# EAGLE board RADiuS-S (EAGLE 6.2)
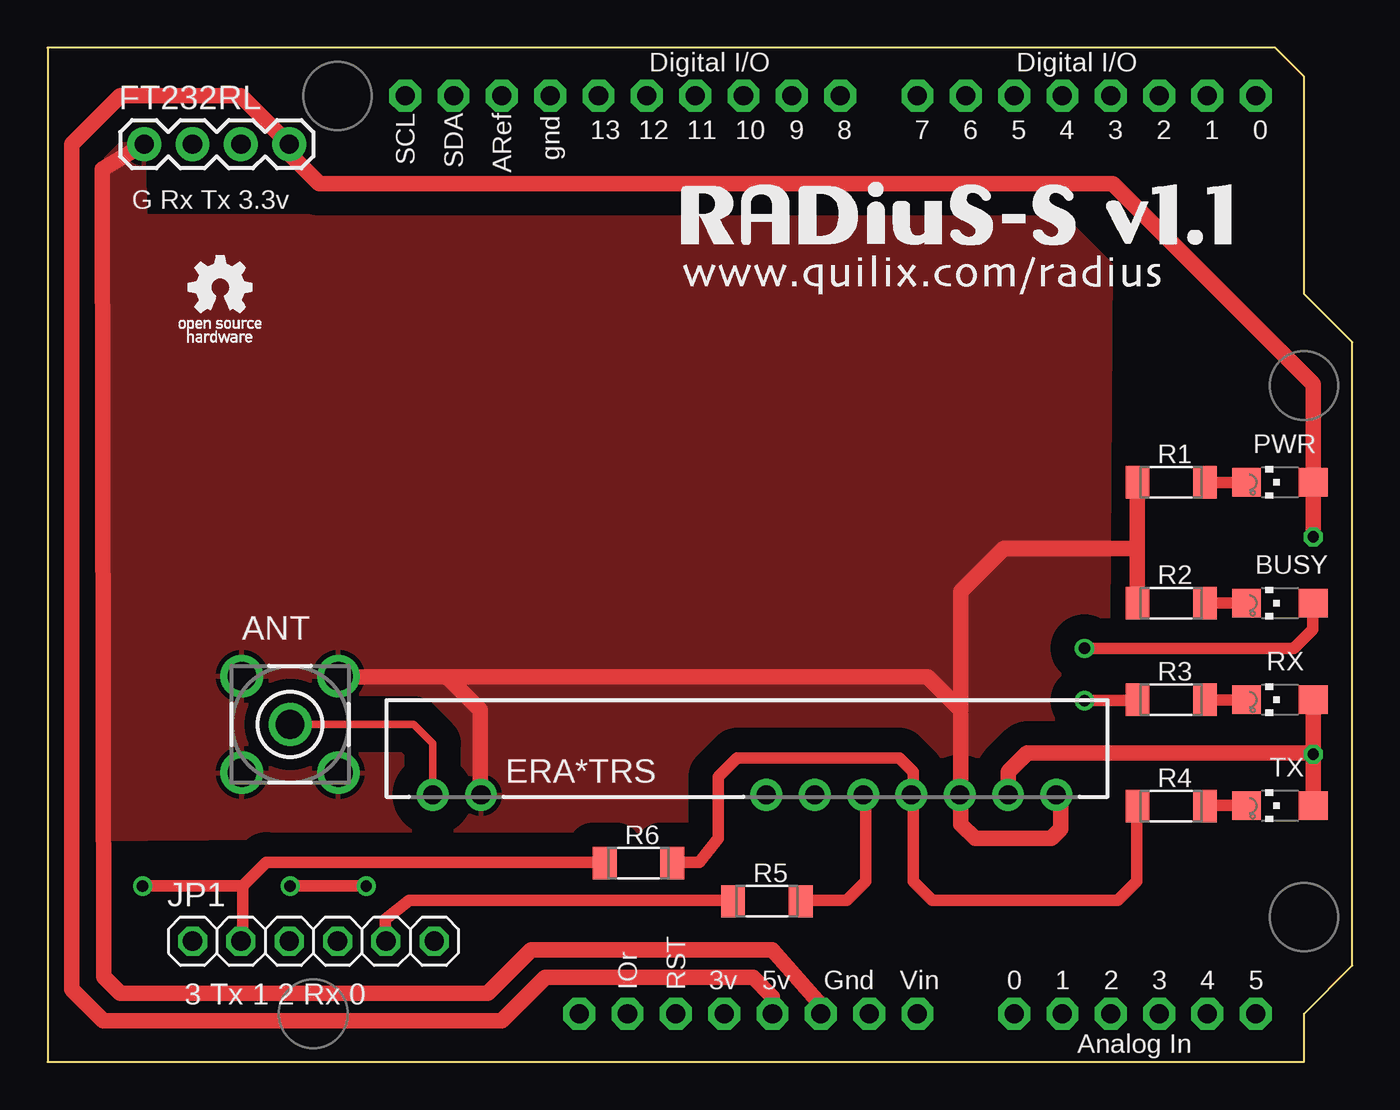
[diagram p0: board, top side]
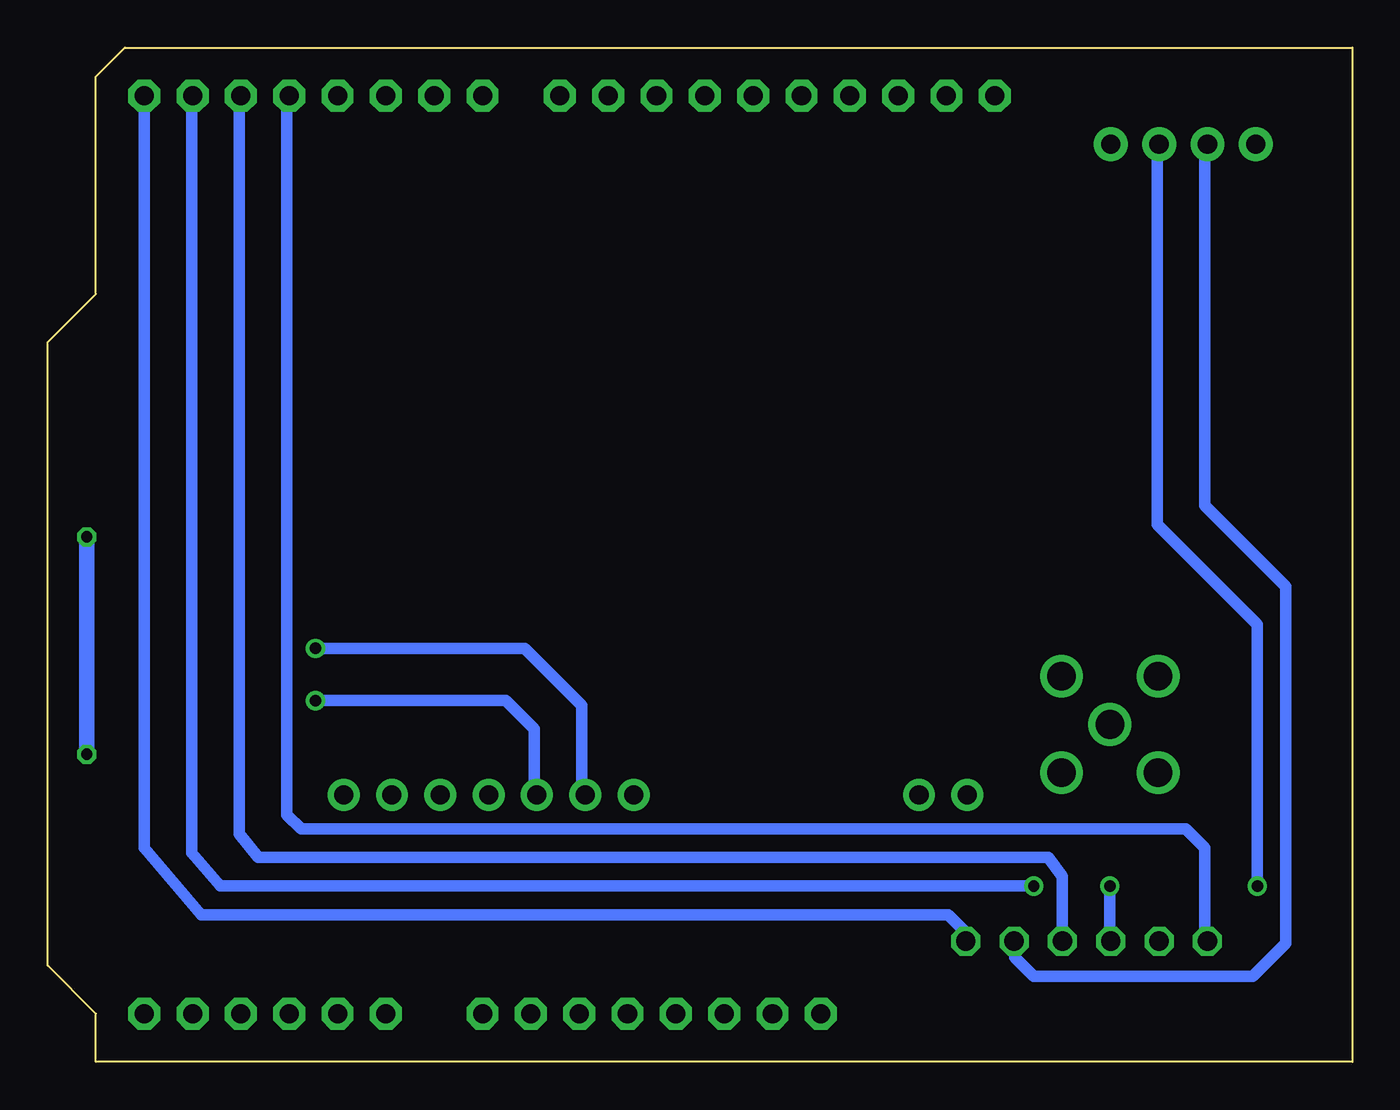
[diagram p1: board, bottom side, seen from below]

Size 68.58 x 53.34 mm. Coordinates in mm from the lower left corner, seen from the top.
Outline: 0,53.34 64.52,53.34 66.04,51.82 66.04,40.39 68.58,37.85 68.58,5.08 66.04,2.54 66.04,0 0,0 0,53.33
Copper layers (1*16): Top 0.035mm / dielectric 1.5mm / Bottom 0.035mm
Design rules: minimum track width 10mil, minimum drill 24mil, track to track 8mil, track to pad 8mil, pad to pad 8mil, via to via 8mil, smd to smd 0mil, copper to edge 0.5mm, drill to drill 8mil, minimum pad ring 10mil, minimum via ring 8mil, stop-mask expansion 4mil, vias tented up to drill 0.3mm, thermal gap 10mil

## Footprints (pad centres in the part's own frame; a part is rotated, then mirrored left to right if it is on the bottom)
LTI-SASF54GT = drill 1.5 pad 2.2: 1 0,0; 2 -2.54,2.54; 3 2.54,2.54; 4 2.54,-2.54; 5 -2.54,-2.54
CHIPLED_1206 = smd 1.5 x 1.5: A 0,-1.75; C 0,1.75
SIL9 = drill 1 pad 1.676: 1 -16.51,2.54; 2 -13.97,2.54; 3 1.03,2.54; 4 3.57,2.54; 5 6.11,2.54; 6 8.65,2.54; 7 11.19,2.54; 8 13.73,2.54; 9 16.27,2.54
1X04-BIG = drill 1.016 pad 1.778: 1 0,0; 2 2.54,0; 3 5.08,0; 4 7.62,0
1X06 = drill 1.016 octagon: 1 -6.35,0; 2 -3.81,0; 3 -1.27,0; 4 1.27,0; 5 3.81,0; 6 6.35,0
1206_W = smd 1.25 x 1.7: 1 -1.775,0; 2 1.775,0
ARDUINOR3-BPLACE = drill 1 pad 1.676 octagon: 3V 35.56,2.54; 5V 38.1,2.54; A0 50.8,2.54; A1 53.34,2.54; A2 55.88,2.54; A3 58.42,2.54; A4 60.96,2.54; A5 63.5,2.54; AREF 23.876,50.8; D0 63.5,50.8; D1 60.96,50.8; D2 58.42,50.8; D3 55.88,50.8; D4 53.34,50.8; D5 50.8,50.8; D6 48.26,50.8; D7 45.72,50.8; D8 41.656,50.8; D9 39.116,50.8; D10 36.576,50.8; D11 34.036,50.8; D12 31.496,50.8; D13 28.956,50.8; GND 26.416,50.8; GND1 43.18,2.54; GND2 40.64,2.54; IOREF 30.48,2.54; RESERVED 27.94,2.54; RESET 33.02,2.54; SCL 18.796,50.8; SDA 21.336,50.8; VIN 45.72,2.54

## Placement (x,y rotation side)
ANT  [LTI-SASF54GT]  12.75,17.75 0 top
BUSY  RED  [CHIPLED_1206]  64.77,24.13 90 top
ERA*TRS  [SIL9]  36.75,11.5 0 top
FT232RL  1X4-BIG  [1X04-BIG]  5.08,48.26 0 top
JP1  [1X06]  13.97,6.35 0 top
PWR  BLUE  [CHIPLED_1206]  64.77,30.48 90 top
R1  1K5  [1206_W]  59.05,30.48 0 top
R2  1K5  [1206_W]  59.05,24.13 0 top
R3  330R  [1206_W]  59.05,19.05 0 top
R4  330R  [1206_W]  59.05,13.45 0 top
R5  220R  [1206_W]  37.8,8.45 0 top
R6  220R  [1206_W]  31.05,10.45 0 top
RX  GREEN  [CHIPLED_1206]  64.77,19.05 90 top
TX  ORANGE  [CHIPLED_1206]  64.77,13.47 90 top
U1  ARDUINOR3-BPLACE  [ARDUINOR3-BPLACE]  0,0 0 top

## Library data of the parts
ANT = con-coax
BUSY FT232RL JP1 PWR RX TX = adafruit
ERA*TRS = lprs
R1-R6 = PBF
U1 = RADiuS_Eagle_Part_Library

## Nets
3V: U1.3V
3V3: FT232RL.4 PWR.A RX.A TX.A U1.5V
GND: ANT.2 ANT.3 ANT.4 ANT.5 ERA*TRS.2 FT232RL.1 R1.1 R2.1 U1.GND2
GND1: U1.GND1
N$1: PWR.C R1.2
N$2: BUSY.C R2.2
N$4: R3.2 RX.C
S$2: R3.1
S$19: ANT.1
VIN: U1.VIN

## Tracks (layer width: path | path; a pad name or v marks a point on that pad's centre or on a via)
3V3  (via drill 0.6)
  Top 0.406: FT232RL.4 12.7,47.77
  Top 0.813: U1.5V 38.1,3.43 37.08,4.45 26.16,4.45 23.88,2.16 2.92,2.16 1.27,3.81 1.27,48.26 3.81,50.8 10.16,50.8 FT232RL.4 | 66.55,30.63 66.55,30.48 PWR.A | PWR.A v66.52,27.61 | RX.A v66.52,16.18 66.52,13.97 TX.A | PWR.A 66.52,35.65 55.98,46.19 14.28,46.19 12.7,47.77
  Bottom 0.813: v66.52,27.61 v66.52,16.18
GND
  Top 0.406: R2.1 57.28,27 57,27
  Top 0.61: 56.98,27.01 57,27 | 48,18.25 48,18.5
  Top 0.813: R1.1 R2.1 | 53.25,14 53.25,12.25 52.75,11.75 48.75,11.75 48,12.5 48,18.25 | 57,27 50.25,27 48,24.75 48,18.5 46.25,20.25 21,20.25 | 22.75,14 22.75,18.5 21,20.25 | 15.25,20.25 21,20.25 | U1.GND2 40.64,3 38.08,5.89 25.43,5.89 23.14,3.62 3.81,3.62 2.95,4.48 2.88,46.94 FT232RL.1
  pour Top (isolate 1.27): 2.08,46.66 2.07,11.73 34,12 34,15.5 35.75,17.25 45.25,17.25 46.75,16 46.75,15.5 46.81,15.44 55.88,15.44 56,17.57 53.25,17.5 53.25,23.25 55.75,23.25 55.88,41.91 53.34,44.45 5.14,44.45 5,49.48
N$1
  Top 0.61: R1.2 PWR.C
N$2
  Top 0.61: BUSY.C R2.2
N$4
  Top 0.61: R3.2 RX.C
S$2
  Top 0.406: R3.1
S$3
  Top 0.61: 17.75,6.5 17.75,7.5 19,8.5 35.5,8.5
S$4
  Top 0.813: 50.5,14 50.5,15.25 51.5,16.25 66.5,16.25
S$5
  Top 0.61: 60.75,13.5 62.5,13.5
S$6
  Top 0.61: 45.5,14 45.5,15.25 44.75,16 36.25,16 35.25,15 35.25,11.75 34.25,10.5 33.25,10.5
S$7
  Bottom 0.61: 21.25,7.75 60.5,7.75 63.5,11.25 63.5,50.75
S$9
  Bottom 0.61: 15.25,6.25 15.25,9.75 16,10.75 57.5,10.75 58.5,12 58.5,50.75
S$10  (via drill 0.6)
  Top 0.61: v12.75,9.25 v16.75,9.25
  Bottom 0.61: 12.75,6.25 v12.75,9.25
S$11
  Bottom 0.61: 40.5,14 40.5,18.75 43.5,21.75 54.5,21.75
S$12
  Bottom 0.61: 61,50.75 61,11 59.5,9.25 16.75,9.25
S$13
  Bottom 0.61: 56,50.75 56,13 55.25,12.25 8.75,12.25 7.75,11.25 7.75,6.25
S$14
  Bottom 0.61: 20.25,6.25 20.25,6.75 21.25,7.75
S$15
  Top 0.61: 43,13.75 43,9.5 42,8.5 39.75,8.5
S$16
  Top 0.61: 57.25,13 57.25,9.5 56.25,8.5 46.5,8.5 45.5,9.5 45.5,13.75
S$17
  Top 0.61: 66.5,23.75 66.5,22.75 65.5,21.75 54.5,21.75
S$18  (via drill 0.6)
  other vias: 54.5,21.75
S$19
  Top 0.406: 20.25,14 20.25,16.75 19.25,17.75 ANT.1
S$20  (via drill 0.6)
  Top 0.61: 10.25,6.5 10.25,9.25 | 10.25,9.25 11.5,10.5 28.75,10.5 | v5,9.25 10.25,9.25
  Bottom 0.61: 10.25,48.25 10.25,28.25 5,23 v5,9.25
S$21
  Bottom 0.61: 7.5,48.25 7.75,48 7.75,29.25 3.5,25 3.5,6.25 5.25,4.5 16.75,4.5 17.75,5.5 17.75,6.5
S$22
  Bottom 0.61: 54,19 44.5,19 43,17.5 43,14
S$23  (via drill 0.6)
  Top 0.61: v54.5,19 57,19

## Text on the board
tNames: G Rx Tx 3.3v | 3 Tx 1 2 Rx 0